# Altium PCB C2Sv0_PROCESSOR.PcbDoc (part 2 of 3)
Units mm, origin at the board's own origin, x right, y up, seen from the top; angles counter-clockwise.
Board outline 116 x 70 mm, 4 copper layers (Top Layer, Mid Layer 1, Mid Layer 2, Bottom Layer), stack 1.57 mm thick; 172 components, 108 nets, 793 pads, 402 vias.
Unrouted connection lines stored in the file: 3.
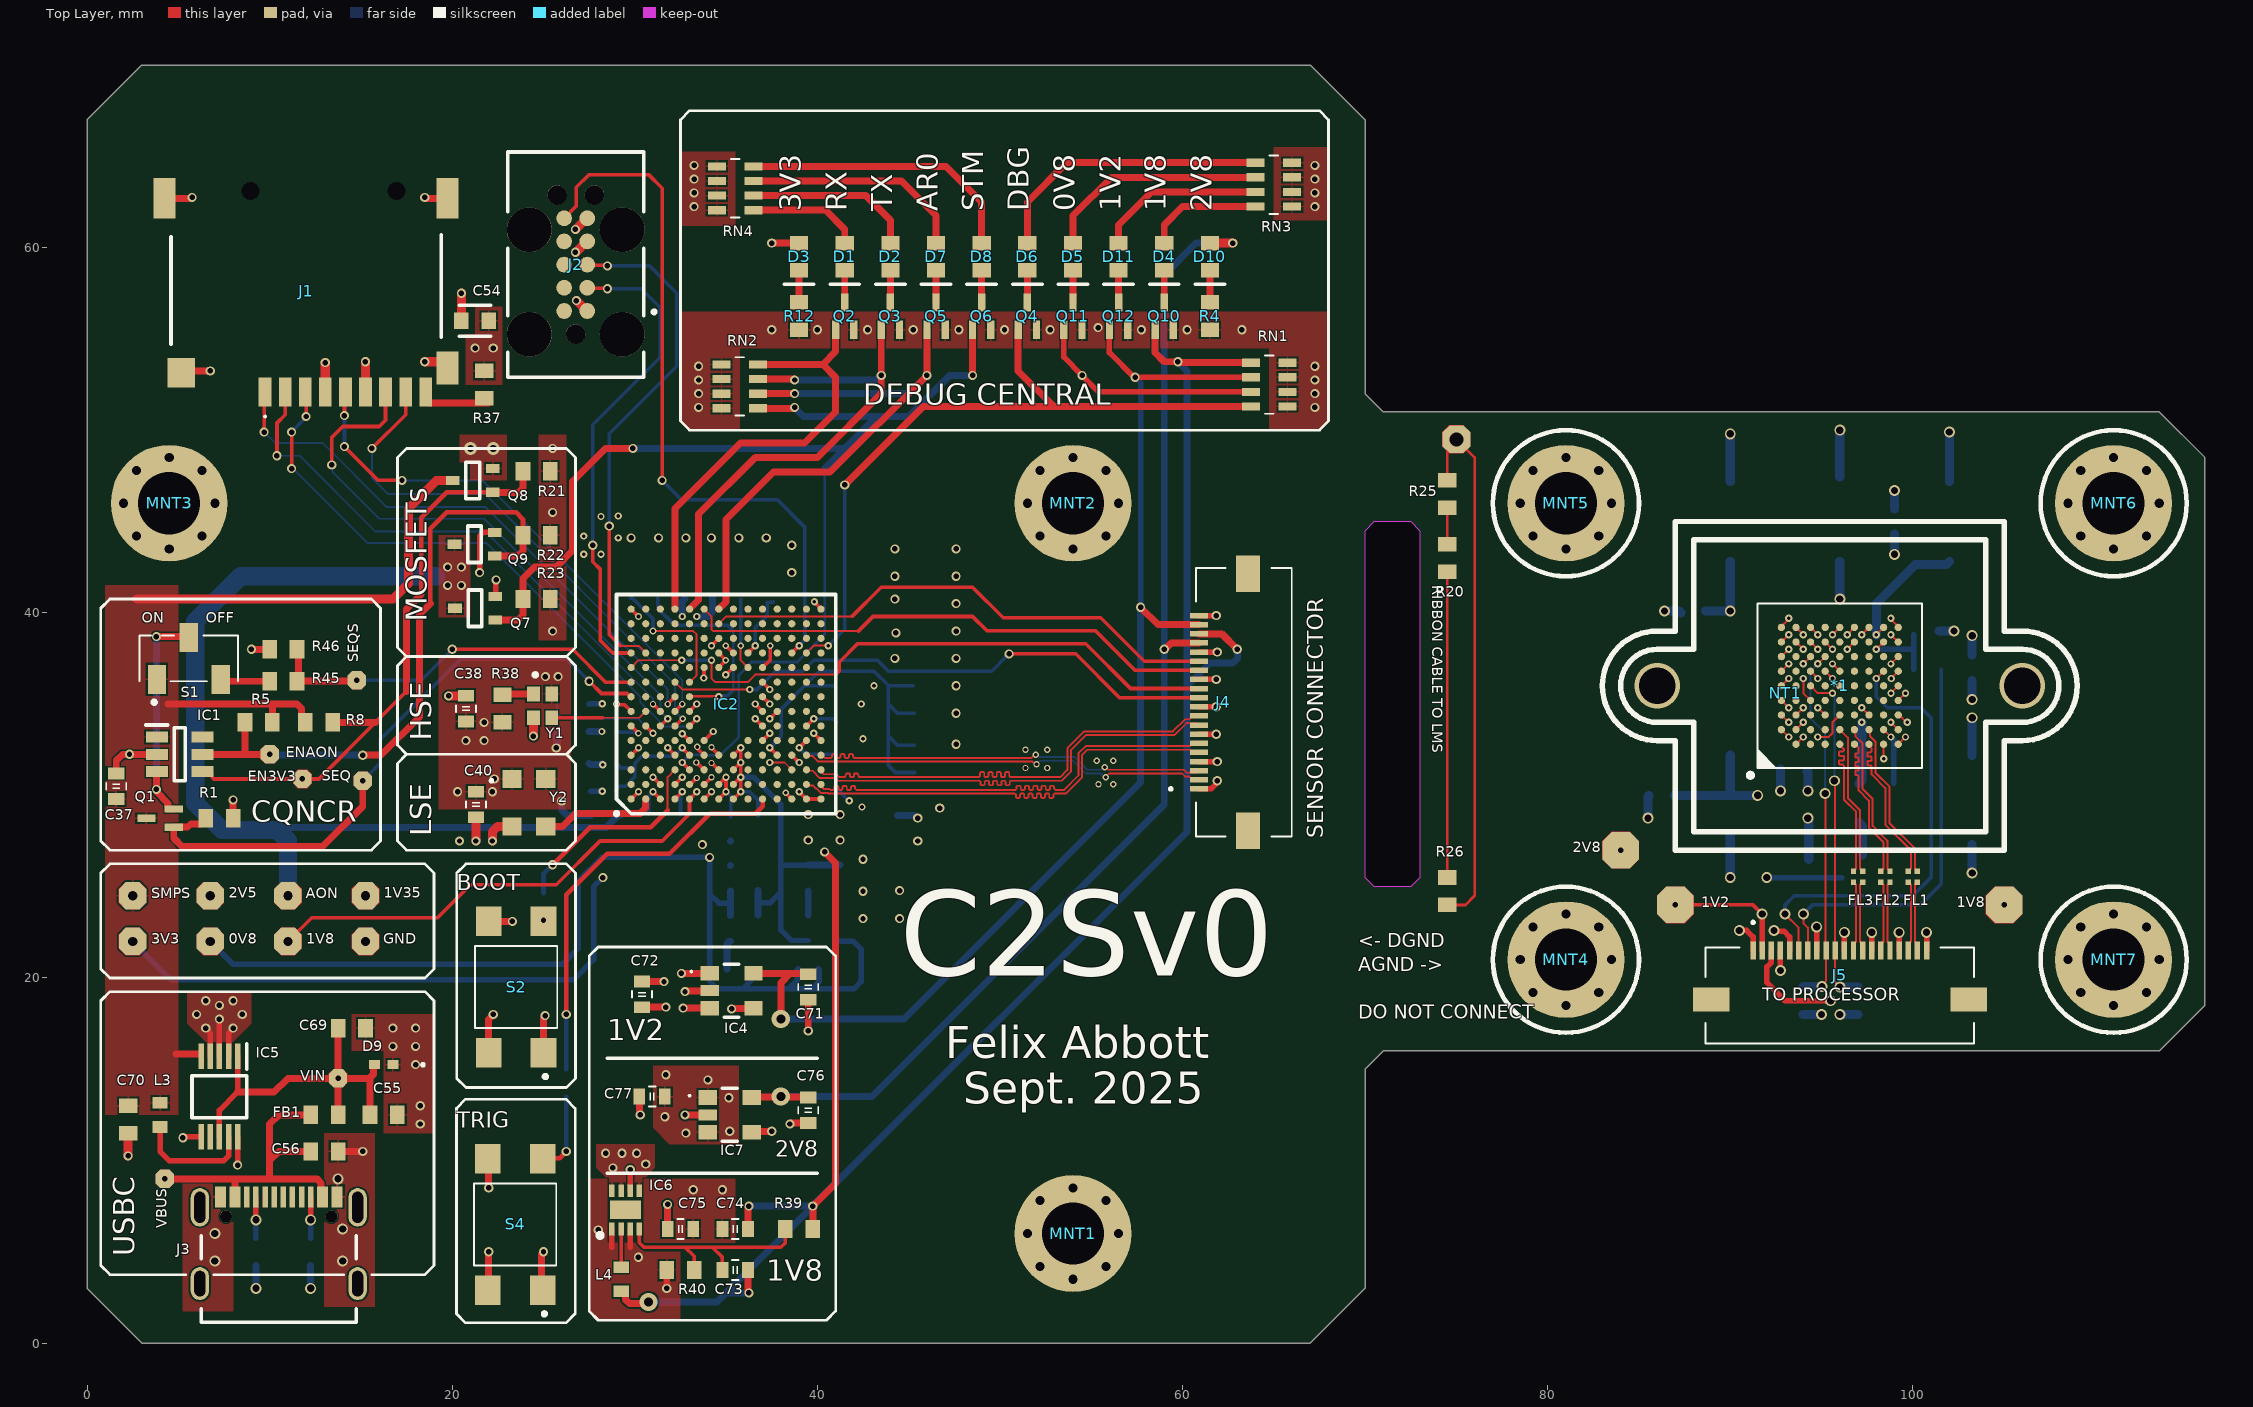
[diagram p0: Top Layer view]

## Via types
v1: diameter 0.5, hole 0.3, Top Layer to Bottom Layer, tented both sides, 208 vias
v2: diameter 0.4, hole 0.2, Top Layer to Bottom Layer, tented both sides, 112 vias
v3: diameter 0.6, hole 0.4, Top Layer to Bottom Layer, tented both sides, 47 vias
v4: diameter 0.35, hole 0.2, Top Layer to Bottom Layer, tented both sides, 28 vias
v5: diameter 1, hole 0.5, Top Layer to Bottom Layer, tented both sides, 3 vias
v6: diameter 2.5, hole 2, Top Layer to Bottom Layer, 2 vias
v7: diameter 0.7, hole 0.4, Top Layer to Bottom Layer, tented both sides, 2 vias

## Nets (pads, with @x,y where several pads share a name; then routed paths per layer and width w, separated by ;. In a path a pad name is that pad's centre, name@x,y a point inside that pad or via, vN(x,y) a via of type N, cw(c..) or ccw(c..) an arc to the next point about the centre after c; other vN are vias at no path point) (continued)
2V8: (continued)
  Mid Layer 2 w0.3: 2V8.TP@84,27 90.129,27 90.629,26.5 ; v3(90,40.1) 90,40.058 90.629,39.429 ; v3(92,25.5) 91.329,25.5 90.629,24.8 ; v3(92.75,20.411) 92.339,20 91.1,20 89.8,21.3 89.8,23.971 90.629,24.8 ; v2(93.2,33.2) 91.2,33.2 90.629,32.629 ; v2(93.2,38.8) 92.029,38.8 90.629,37.4 ; v2(94,38.798) 94,39.85 93.1,40.75 ; v2(94.8,38.798) 94.8,40.207 94.257,40.75 ; v3(99,43.2) 99,42.2 97.55,40.75 v3(96,40.75) 94.257,40.75 ; 90.629,24.8 90.629,26.5 ; 90.629,26.5 90.629,32.629 ; 90.629,32.629 90.629,37.4 ; 90.629,37.4 90.629,39.429 ; 90.629,39.429 91.95,40.75 93.1,40.75 ; 93.1,40.75 94.257,40.75
  Mid Layer 2 w0.381: 1V35.TP@15.25,24.5 17.6,24.5 23,19.1 23,17.1 24.2,15.9 37,15.9 38,14.9 v5(38,13.5)
  Bottom Layer w0.3: v3(92,25.5) 96.11,25.5
  Bottom Layer w0.381: v5(38,13.5) 43,13.5 59,29.5 v1(59,38) 59,58.5 60.75,60.25 v1(62.75,60.25)
  Bottom Layer w0.5: C49.2@88.65,40.1 v3(90,40.1) C46.2@90,42.8 ; v3(96,40.75) C44.2@96,42.8 ; v3(99,43.2) C51.2@99,44.3
3V3: C7.2 C8.2 C9.2 C10.2 C19.1 C38.2 C40.1 C54.1 C72.2 C75.1 C77.1 D3.A IC2.A1 IC2.A4 IC2.C2 IC2.G10 IC2.G11 IC2.G12 IC4.1 IC4.3 IC6.5 IC6.7 IC6.8 IC7.1 IC7.3 J1.4 J2.1 Q8.2 R2.1 R3.1 R7.1 R37.1 R38.1 RN3.1 RN3.2 RN3.3 RN3.4 RN4.1 RN4.2 RN4.3 RN4.4 S2.4 S4.4 Y1.4 Y2.1 Y2.4 | length 23.7
  Top Layer w0.2: v1(26.8,57.1) v1@26.815,57.1 ; J2.1@27.385,56.53 J2.1@27.4,56.53 ; IC2.A1@29.8,29.8 v2(30.2,30.2) ; IC2.A4@29.8,32.2 v2(30.2,32.6) ; v2(31,31) IC2.C2@31.4,30.6 ; v2(34.2,38.2) IC2.G12@34.6,38.6 ; IC2.G10@34.6,37 34.6,37.007 34.993,37.4 v4@34.993,37.407 ; IC2.G11@34.6,37.8 34.6,37.793 34.987,37.407 v4(34.987,37.4)
  Top Layer w0.381: S4.4@21.95,10.1 22,10.05 v1(22,8.5) ; S2.4@22,23.1 v1(23.3,23.1) ; Y1.4@25.45,35.55 Y1.4@25.609,35.71 ; C72.2@30.4,18.4 v1(31.7,18.4) ; C77.1@31.65,13.5 C77.1@31.675,13.475 ; C75.1@31.8,6.25 v1(31.8,7.6) ; v1(32.55,20.25) IC4.1@34.1,20.25 ; v1(32.65,18.35) IC4.3@34.1,18.35 ; v1(37.5,60.25) D3.A@39,60.25
  Top Layer w0.5: J1.4@13.05,52.1 v1(13.05,53.7) ; v1@26.815,57.1 J2.1@27.385,56.53
  Bottom Layer w0.381: v1(25.7,32.6) 25.7,32.632 25.75,32.682 R3.1@25.75,33.5 ; v1(26,29.7) 26,29.2 26.3,28.9 C9.2@27.6,28.9 ; R7.1@27.5,31.75 27.566,31.684 v2(28.25,31.684) 28.25,31.689 v2@28.2,31.739 ; R2.1@27.5,33.5 v2(28.2,33.5) ; v2(33.4,39.8) 34,39.8 34.25,40.05 C8.2@34.25,40.8 ; C10.2@44.4,28.9 45.318,28.9 45.468,28.75 v1(45.5,28.75)
  other v1: 28.8,9.6 30.6,9.8 28.4,10.4 29.3,10.4 30.1,10.4 32.8,11.5 35.2,11.6 31.65,12.4 35.154,13.44 34.004,14.415 31.7,14.7 39.5,28.95 41.25,28.95 20.3,30.2 22.2,30.2 22.3,30.9 20.75,33 21.75,33 21.75,34 25.1,36.5 25.8,36.5 21.25,54.5 22.25,54.5 33.25,62.25 67.25,62.25 33.25,63 67.25,63 33.25,63.75 67.25,63.75 33.25,64.5 67.25,64.5
  other v7: 21,49 22.25,49
3V3+: 3V3.TP C37.2 C70.2 IC1.1 IC5.5 L3.1 Q1.3 Q8.3 R5.1 R8.1 S1.1 | length 33
  Top Layer w0.381: 4.425,35 10.1,35 ; 4.872,15.828 IC5.5@6.209,15.828 ; R5.1@10.15,34 10.15,34.95 10.1,35 ; R8.1@11.95,34 11.752,34.198 11.752,34.748 11.5,35 10.1,35
  Top Layer w0.5: 2.75,40.75 16.75,40.75 17.6,41.6 17.6,45.7 19.15,47.25 Q8.3@20.025,47.25
AGND: *1.A3 *1.B8 NT1.1 | length 2.9
  Top Layer w0.11: *1.A3@92.8,34.4 92.8,34.398 93.198,34 v2(93.198,33.998) ; *1.B8@93.6,38.4 v2(94,38)
  Mid Layer 1 w0.11: 92.4,37.6 93.6,37.6 v2(94,38)
AR_CLK: *1.H2 Y3.3 | length 3.2
  Top Layer w0.11: *1.H2@98.4,33.6 v2(98.8,33.2)
  Bottom Layer w0.3: v2(98.8,33.2) 98.8,33.186 98.95,33.036 Y3.3@98.95,30.65
AR_CLK_N: *1.E2 FL3.1 | length 8.3
  Top Layer w0.11: *1.E2@96,33.6 96.443,33.157 96.443,29.856 97.106,29.193 97.106,25.994 FL3.1@97.25,25.85
AR_CLK_P: *1.E1 FL3.4 | length 8.3
  Top Layer w0.11: *1.E1@96,32.8 96,32.76 96.232,32.528 96.232,32.461 96.167,32.396 95.986,32.396 95.963,32.373 95.963,32.183 95.986,32.159 96.208,32.159 96.232,32.136 96.232,31.946 96.208,31.922 95.986,31.922 95.963,31.899 95.963,31.709 95.986,31.685 96.167,31.685 96.232,31.621 96.232,31.566 96.232,29.768 96.894,29.106 96.894,25.994 FL3.4@96.75,25.85
AR_DATA0_N: *1.G2 FL1.1 | length 8.8
  Top Layer w0.11: *1.G2@97.6,33.6 97.655,33.545 97.655,33.249 97.957,32.948 97.957,31.243 98.712,30.488 98.712,28.488 100.106,27.093 100.106,25.994 FL1.1@100.25,25.85

## Text inside footprints (layer, text, board x,y; h text height)
D1: Top Assembly "+" at 40.892,60.817 h0.5 r90
D2: Top Assembly "+" at 43.392,60.817 h0.5 r90
D3: Top Assembly "+" at 38.392,60.817 h0.5 r90
D4: Top Assembly "+" at 58.392,60.817 h0.5 r90
D5: Top Assembly "+" at 53.392,60.817 h0.5 r90
D6: Top Assembly "+" at 50.892,60.817 h0.5 r90
D7: Top Assembly "+" at 45.892,60.817 h0.5 r90
D8: Top Assembly "+" at 48.392,60.817 h0.5 r90
D10: Top Assembly "+" at 60.892,60.817 h0.5 r90
D11: Top Assembly "+" at 55.892,60.817 h0.5 r90